# Altium PCB BLE_Module_1R0.PcbDoc
Units mm, origin at the board's own origin, x right, y up, seen from the top; angles counter-clockwise.
Board outline 46.57 x 29.21 mm, 2 copper layers (Top Layer, Bottom Layer); 16 components, 14 nets, 76 pads, 13 vias.
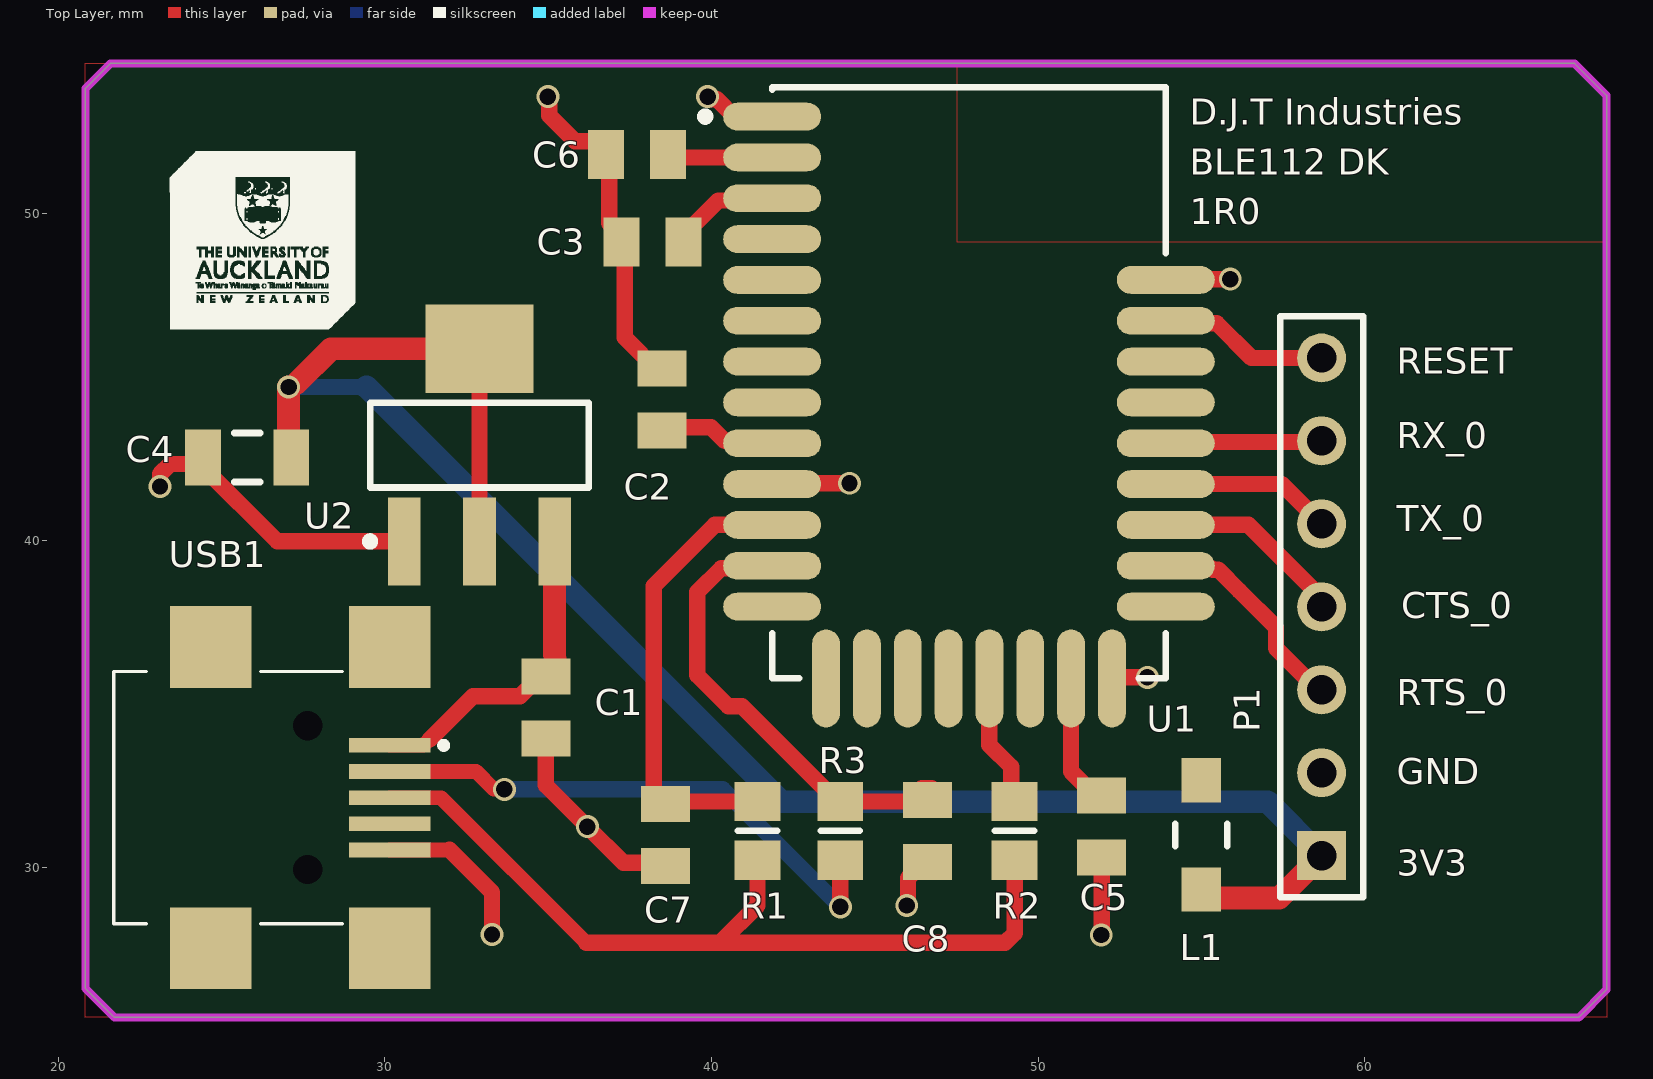
[diagram p0: Top Layer view]
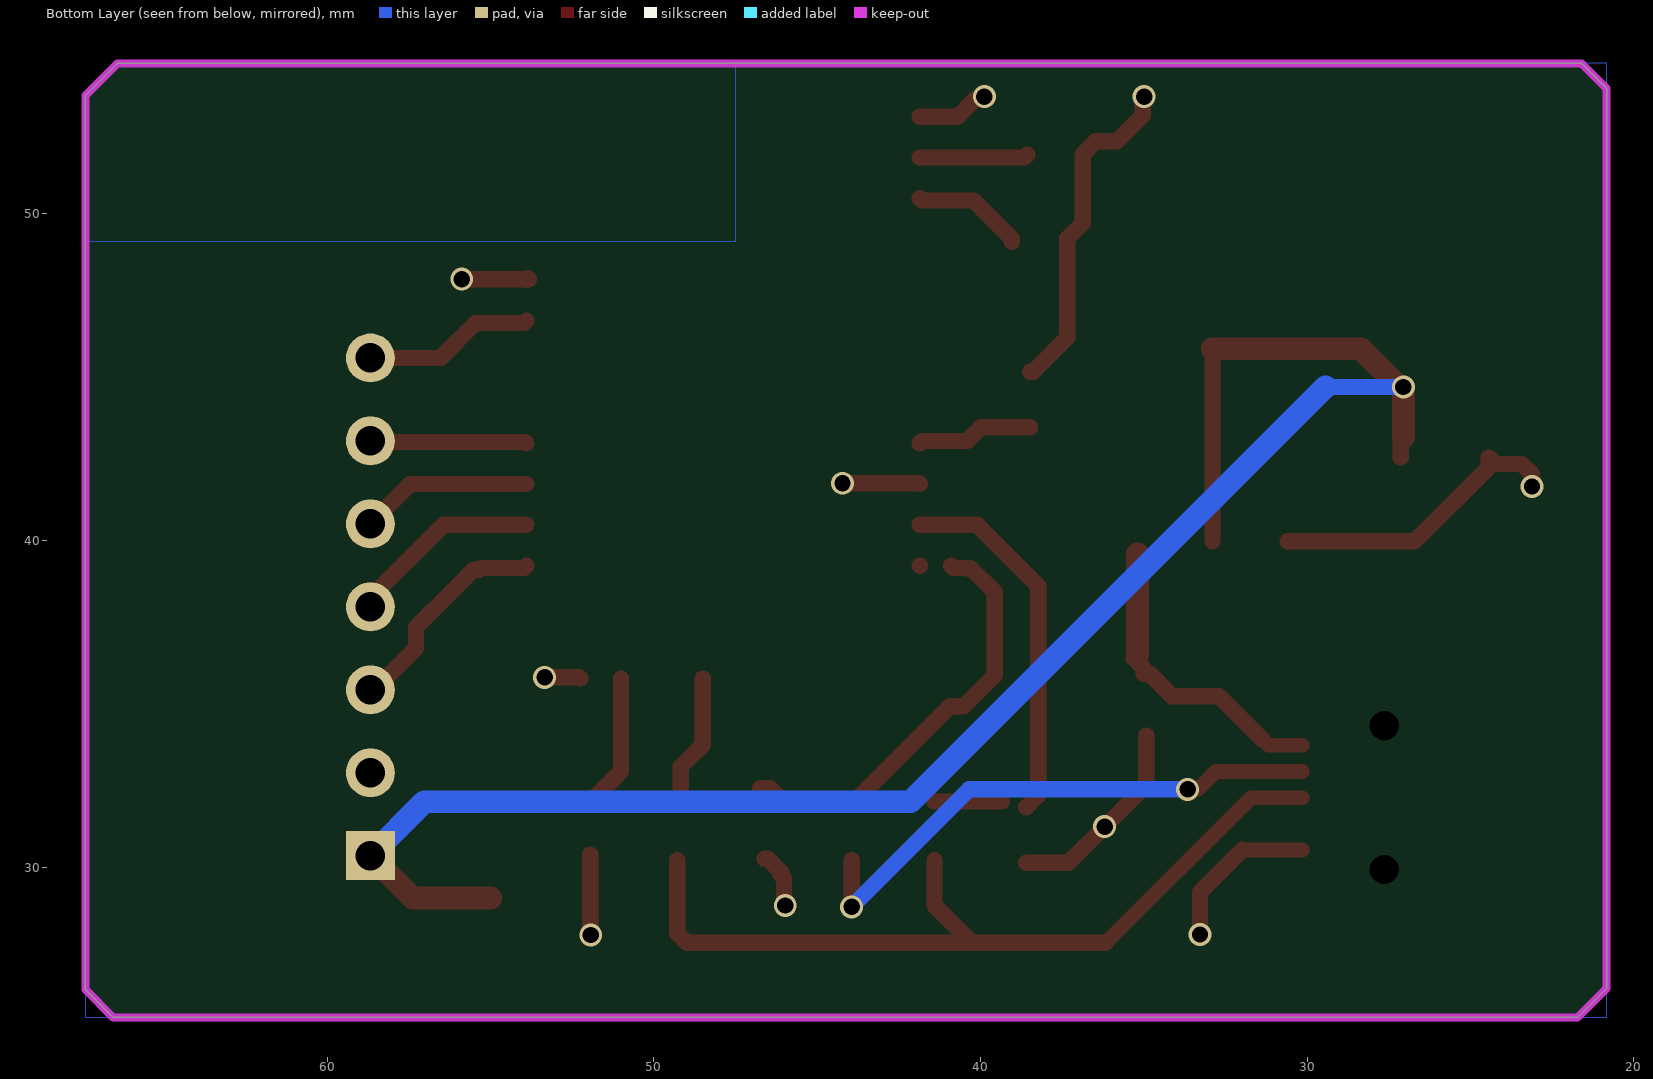
[diagram p1: Bottom Layer view, seen from below]

## Layer stack, top to bottom
Top Solder: solder mask 0.0102, Solder Resist, Dk 3.5
Top Layer: signal copper 0.0356
Dielectric 1: dielectric 0.32, FR-4, Dk 4.8
Bottom Layer: signal copper 0.0356
Bottom Solder: solder mask 0.0102, Solder Resist, Dk 3.5

## Board outline
20.828,26.289 20.828,53.848 21.59,54.61 66.421,54.61 67.4,53.631 67.4,26.252 66.548,25.4 21.717,25.4

## Design rules (kind name [scope] priority, off if disabled: settings)
Clearance clearance_4 [InNamedPolygon('NONET_L01_P000') Or InNamedPolygon('NONET_L02_P001')] p1: gap=0.4 ignorepadtopadclearanceinfootprint=FALSE
Clearance clearance_3 [InNamedPolygon('NONET_L01_P000') Or InNamedPolygon('NONET_L02_P001')] p2: gap=0.254 ignorepadtopadclearanceinfootprint=FALSE except(0: Arc-Hole Track-Hole SMDPad-Hole THPad-Hole Via-Hole Fill-Hole Poly-Hole Region-Hole Text-Hole)
Clearance Clearance_2 [InNamedPolygon('NONET_L01_P000') Or InNamedPolygon('NONET_L02_P001')] p3: gap=0.4 ignorepadtopadclearanceinfootprint=FALSE
Clearance Clearance_1 [All] p4: gap=0.3 ignorepadtopadclearanceinfootprint=TRUE
Clearance [All] p5: gap=0.5 ignorepadtopadclearanceinfootprint=TRUE except(0.3: Track-SMDPad)
PolygonConnect Vias_1 [All vs IsNamedPolygon('NONET_L02_P001')] p1: connectstyle=Direct reliefconductorwidth=0.254 reliefentries=4 polygonreliefangle="90 Angle" airgapwidth=0.254
PolygonConnect PolygonConnect_5 [All vs IsNamedPolygon('NONET_L02_P001')] p2: connectstyle=Relief reliefconductorwidth=0.254 reliefentries=4 polygonreliefangle="90 Angle" airgapwidth=0.254
PolygonConnect Vias [All vs IsNamedPolygon('NONET_L02_P001')] p3: connectstyle=Direct reliefconductorwidth=0.254 reliefentries=4 polygonreliefangle="90 Angle" airgapwidth=0.254
PolygonConnect PolygonConnect_4 [All vs IsNamedPolygon('NONET_L02_P001')] p4: thpad.connectstyle=Direct thpad.reliefconductorwidth=0.254 thpad.reliefentries=4 thpad.polygonreliefangle="90 Angle" thpad.airgapwidth=0.254 smdpad.connectstyle=Relief smdpad.reliefconductorwidth=0.254 smdpad.reliefentries=4 smdpad.polygonreliefangle="90 Angle" smdpad.airgapwidth=0.254 via.connectstyle=Relief via.reliefconductorwidth=0.254 via.reliefentries=4 via.polygonreliefangle="90 Angle" via.airgapwidth=0.254
PolygonConnect PolygonConnect_3 [All vs IsNamedPolygon('NONET_L02_P001')] p5: thpad.connectstyle=Direct thpad.reliefconductorwidth=0.254 thpad.reliefentries=4 thpad.polygonreliefangle="90 Angle" thpad.airgapwidth=0.254 smdpad.connectstyle=Direct smdpad.reliefconductorwidth=0.254 smdpad.reliefentries=4 smdpad.polygonreliefangle="90 Angle" smdpad.airgapwidth=0.254 via.connectstyle=Relief via.reliefconductorwidth=0.254 via.reliefentries=4 via.polygonreliefangle="90 Angle" via.airgapwidth=0.254
PolygonConnect PolygonConnect_2 [All vs IsNamedPolygon('NONET_L01_P000')] p6: thpad.connectstyle=Direct thpad.reliefconductorwidth=0.254 thpad.reliefentries=4 thpad.polygonreliefangle="90 Angle" thpad.airgapwidth=0.254 smdpad.connectstyle=Direct smdpad.reliefconductorwidth=0.254 smdpad.reliefentries=4 smdpad.polygonreliefangle="90 Angle" smdpad.airgapwidth=0.254 via.connectstyle=Relief via.reliefconductorwidth=0.254 via.reliefentries=4 via.polygonreliefangle="90 Angle" via.airgapwidth=0.254
PolygonConnect PolygonConnect_1 [All vs IsNamedPolygon('NONET_L02_P001')] p7: thpad.connectstyle=Direct thpad.reliefconductorwidth=0.254 thpad.reliefentries=4 thpad.polygonreliefangle="90 Angle" thpad.airgapwidth=0.254 smdpad.connectstyle=Direct smdpad.reliefconductorwidth=0.254 smdpad.reliefentries=4 smdpad.polygonreliefangle="90 Angle" smdpad.airgapwidth=0.254 via.connectstyle=Relief via.reliefconductorwidth=0.254 via.reliefentries=4 via.polygonreliefangle="90 Angle" via.airgapwidth=0.254
PolygonConnect [All] p8: connectstyle=Direct reliefconductorwidth=0.254 reliefentries=4 polygonreliefangle="90 Angle" airgapwidth=0.254
RoutingVias [All] p1: holewidth=0.711 width=1.27 viastyle="Through Hole" minholewidth=0.711 minwidth=1.27 maxholewidth=0.711 maxwidth=1.27
SolderMaskExpansion [All] p1: expansion=0.102 istentingtop=FALSE
Width [All] p1: maxlimit=0.7 minlimit=0.45 preferedwidth=0.5 checkconnectedcopper=TRUE
30 further rules are at their usual default settings.

## Components (designator, comment, footprint, x,y, rotation, side; value= is the part's Value field where it differs from the comment)
C1 "1u" C0805 34.925,34.886 r90 top value=?
C2 "1u" C0805 38.481,44.323 r270 top value=?
C3 "1u" C0805 38.188,49.149 r0 top value=?
C4 "4u7" C1206 25.781,42.545 r0 top value=100nF/100V
C5 "1u" C0805 51.943,31.242 r90 top value=?
C6 "1u" C0805 37.719,51.816 r0 top value=?
C7 "4p7" C0805 38.595,30.986 r90 top value=?
C8 "4p7" C0805 46.609,31.115 r90 top value=?
L1 "1k Ferrite Bead" SMD-1206 54.991,30.988 r90 top
P1 "BLE Headers" HDR1X7 58.674,30.353 r90 top
R1 "Resistor 0805" R0805 41.402,31.115 r270 top value=?
R2 "Resistor 0805" R0805 49.276,31.115 r90 top value=?
R3 "Resistor 0805" R0805 43.942,31.115 r270 top value=?
U1 "BLE112-A-V1" BLUE-BLE112-A-V1_V 47.879,44.831 r0 top
U2 "LDL1117S33R" ? 32.893,42.926 r90 top value=3.3V/1.2A
USB1 "USB Mini B Con" USB_UJ2MAB 26.797,32.131 r270 top

## Footprints (in the part's own frame and the unit in brackets; to place one, negate y for a bottom-side part, rotate by r counter-clockwise, add the part's x,y. Pads: shape width x height; smd on the part's side, far side on the other; paste and mask are expansions set on the pad)
BLUE-BLE112-A-V1_V [mm] "BLE112-A, 30-Leads, Body 12.05x18.1mm, Pitch 1.25mm"
  oval 3x0.85 smd: 1(-6.025,8.15) 2(-6.025,6.9) 3(-6.025,5.65) 4(-6.025,4.4) 5(-6.025,3.15) 6(-6.025,1.9) 7(-6.025,0.65) 8(-6.025,-0.6) 9(-6.025,-1.85) 10(-6.025,-3.1) 11(-6.025,-4.35) 12(-6.025,-5.6) 13(-6.025,-6.85) 22(6.025,-6.85) 23(6.025,-5.6) 24(6.025,-4.35) 25(6.025,-3.1) 26(6.025,-1.85) 27(6.025,-0.6) 28(6.025,0.65) 29(6.025,1.9) 30(6.025,3.15)
  oval 0.85x3 smd: 14(-4.375,-9.05) 15(-3.125,-9.05) 16(-1.875,-9.05) 17(-0.625,-9.05) 18(0.625,-9.05) 19(1.875,-9.05) 20(3.125,-9.05) 21(4.375,-9.05)
  silkscreen extent -8.2,-9.05 6.02,9.05, body extent -6.02,-9.05 6.02,9.05, height 2.3
C0805 [mm]
  rect 1.1x1.5 smd: 1(-0.95,0) 2(0.95,0)
  body extent -1.1,-0.72 1.1,0.72, height 1.1
C1206 [mm] "Chip Capacitor, Body 3.2x1.6mm, IPC High Density"
  rect 1.1x1.7 smd: 1(-1.35,0) 2(1.35,0)
  silkscreen extent -0.4,-0.75 0.4,0.75, body extent -1.6,-0.8 1.6,0.8, height 1.5
HDR1X7 [mm] "Connector; Header; 7 Position"
  rect 1.5x1.5 hole 0.9: 1(0,0)
  round 1.5 hole 0.9: 2(2.54,0) 3(5.08,0) 4(7.62,0) 5(10.16,0) 6(12.7,0) 7(15.24,0)
  silkscreen extent -1.27,-1.27 16.51,1.27
R0805 [mm]
  rect 1.2x1.4 smd: 1(-0.9,0) 2(0.9,0)
  silkscreen extent 0,-0.6 0,0.6, body extent -1.07,-0.7 1.07,0.7, height 0.65
SMD-1206 [mm] "Chip Inductor, 2-Leads, Body 3.2x1.6mm"
  rect 1.35x1.2 smd: 1(-1.675,0) 2(1.675,0)
  silkscreen extent -0.35,-0.8 0.35,0.8, body extent -1.6,-0.8 1.6,0.8, height 1.09
USB_UJ2MAB [mm]
  rect 0.45x2.5 smd: 1(-1.6,3.35) 2(-0.8,3.35) 3(0,3.35) 4(0.8,3.35) 5(1.6,3.35)
  rect 2.5x2.5 smd: 6(-4.61,3.35) 7(4.61,3.35) 8(-4.61,-2.13) 9(4.61,-2.13)
  round 0.45 hole 0.9 unplated: 10(-2.2,0.84) 11(2.2,0.84)
  silkscreen extent -3.86,-5.1 3.86,5.1, body extent -4.83,-5.18 4.83,4.2, height 4.13
? [mm] "SOT223/SC73, 4-Leads, Body 6.5x3.5mm, Pitch 2.3mm, Lead Span 7mm, IPC Low Density"
  rect 2.7x1 smd: 1(-2.95,2.3) 2(-2.95,0) 3(-2.95,-2.3)
  rect 2.7x3.3 smd: 2(2.95,0)
  silkscreen extent -3.07,-3.35 1.3,3.47, body extent -3.65,-3.35 3.65,3.35, height 1.83

## Part data
C1 C2 C3 C5 C6 C7 C8: library part CCAP0805, "CCAP0805", MPN=?, Part Description=?, Type="Surface Mount"
C4: library part "Cap CER Decoup C3216C0G2A104J160AC", "CAP CER 0.1UF 100V C0G 1206", Manufacturer="TDK Corporation", MPN=C3216C0G2A104J160AC, Supplier Part Number 1=1795799, Part Description="CAP CER 0.1UF 100V C0G 1206", Supplier 1=RSComponents, Supplier 2=Element14, Supplier 3=Digi-Key, Supplier 4=Mouser, Supplier Part Number 2=2906828, Supplier Part Number 3=445-172677-1-ND, Supplier Part Number 4=810-C3216C0G2A104J6C, Type="Surface mount"
L1: library part 742792113, "SMD EMI Suppression Ferrite Bead WE-CBF, Z = 120 Ohm", ComponentLink1Description="Manufacturer Link", ComponentLink1URL=http://www.we-online.com, ComponentLink2Description=Datasheet, ComponentLink2URL=http://www.we-online.de/katalog/media/pdf/742792113.pdf, DatasheetVersion=Dec-2005, Impedance="120 Ohm", PackageDescription="Chip Inductor, 2-Leads, Body 3.2 x 1.6 mm", PackageReference=SMD-1206, PackageVersion=2007, PartNumber=742792113
P1: library part "Header 7", "Header, 7-Pin", LatestRevisionDate=17-Jul-2002, LatestRevisionNote="Re-released for DXP Platform.", Publisher="Altium Limited"
R1 R2 R3: library part RES0805, "RES0805", MPN=?, Part Description=?, Type="Surface Mount"
U1: "Bluetooth(R) Low Energy Single Mode Module / , 2 to 3.6 V, -40 to 85 degC, 30-Pin SMD, RoHS, Tape and Reel", Max Operating Temperature="85 degC", Max Supply Voltage="3.6 V", Min Operating Temperature="-40 degC", Min Supply Voltage="2.1 V", ComponentLink1Description="Manufacturer URL", ComponentLink1URL=www.bluegiga.com, ComponentLink2Description=Datasheet, ComponentLink2URL=http://www.mouser.com/ds/2/368/Bluegiga_Technologies_BLE112_Datasheet-558666.pdf, DatasheetVersion="Rev. 1.4, 05/2013", PackageDescription="30-Pin Surface Mount Device, Body 12.05 x 18.1 mm, Pitch 1.25 mm", PackageReference=BLE112-A-V1, Packaging="Cut Tape", PartNumber=BLE112-A-V1, Pins=64, REACH SVHC="No SVHC", RoHSCompliant=true
U2: library part "LDO LDL1117S33R", "IC REG LINEAR 3.3V 1.2A SOT223", Manufacturer=STMicroelectronics, Supplier Part Number 1=2729708, MPN=LDL1117S33R, Part Description="IC REG LINEAR 3.3V 1.2A SOT223", Supplier 1=Element14, Supplier 2=Digi-Key, Supplier 3=Mouser, Supplier Part Number 2=497-17239-1-ND, Supplier Part Number 3=511-LDL1117S33R, Type="Surface mount"
USB1: library part USBMiniB, Supplier Part Number 1=102-4004-1-ND, Supplier 1=Digi-Key

## Via types
v1: diameter 0.7, hole 0.5, Top Layer to Bottom Layer, 13 vias

## Nets (pads, with @x,y where several pads share a name; then routed paths per layer and width w, separated by ;. In a path a pad name is that pad's centre, name@x,y a point inside that pad or via, vN(x,y) a via of type N, cw(c..) or ccw(c..) an arc to the next point about the centre after c; other vN are vias at no path point)
3V3: C2.2 C3.2 C5.2 C6.2 L1.2 U1.2 U1.3 U1.9 U1.20 | length 14.5
  Top Layer w0.5: C2.2@38.481,43.473 39.981,43.473 40.406,43.048 41.787,43.048 U1.9 ; C6.2@38.569,51.816 38.654,51.731 U1.2 ; C3.2@39.038,49.149 39.038,49.249 40.203,50.414 41.787,50.414 U1.3 ; U1.20 51.004,32.931 51.843,32.092 C5.2@51.943,32.092
3V3_IN: C4.2 L1.1 P1.1 U2.2 | length 56.2
  Top Layer w0.5: C4.2@27.051,43.171 C4.2@27.089,43.133 ; v1@27.051,44.612 27.051,44.65 27.205,44.804 v1@27.278,44.804 ; C4.2 C4.2@27.131,43.133 ; U2.2@32.893,39.976 U2.2@32.893,45.876
  Top Layer w0.7: C4.2@27.051,43.171 v1(27.051,44.704) ; v1@27.278,44.804 28.35,45.876 U2.2@32.893,45.876 ; L1.1@54.991,29.059 57.38,29.059 P1.1
  Bottom Layer w0.5: v1(27.051,44.704) 29.438,44.704
  Bottom Layer w0.7: 29.438,44.704 42.138,32.004 57.023,32.004 P1.1
5V: C1.2 U2.3 USB1.1 | length 9.6
  Top Layer w0.45: USB1.1 31.172,33.731 31.35,33.909 USB1.1@31.369,33.909
  Top Layer w0.5: USB1.1@31.369,33.909 32.696,35.236 34.132,35.236 34.425,35.529 34.425,35.536 34.806,35.917 35.006,35.917 35.006,36.102 35.306,36.402 35.193,36.515
  Top Layer w0.7: 35.193,36.515 U2.3@35.193,39.595
CTS_0: P1.4 U1.24 | length 6.1
  Top Layer w0.5: U1.24 56.437,40.481 P1.4@58.81,38.109 ; P1.4 P1.4@58.892,37.973
D+: R1.2 R2.1 USB1.3 | length 26.3
  Top Layer w0.45: USB1.3 31.714,32.131 36.159,27.686
  Top Layer w0.5: 36.159,27.686 40.259,27.686 ; R1.2 41.402,28.829 40.259,27.686 ; R2.1 49.276,27.979 48.983,27.686 40.259,27.686
D-: R3.2 USB1.2 | length 16.9
  Top Layer w0.45: USB1.2 32.787,32.931 33.333,32.385 v1(33.655,32.385)
  Top Layer w0.5: v1(43.942,28.786) R3.2
  Bottom Layer w0.5: v1(33.655,32.385) 40.343,32.385 v1(43.942,28.786)
GND: C1.1 C2.1 C3.1 C4.1 C5.1 C6.1 C7.1 C8.1 P1.2 U1.1 U1.10 U1.21 U1.30 U2.1 USB1.5 | length 43
  Top Layer w0.45: USB1.5 31.976,30.531
  Top Layer w0.5: v1(23.114,41.656) 23.114,42.037 23.424,42.347 24.233,42.347 C4.1 24.431,42.245 26.7,39.976 U2.1 ; 31.976,30.531 33.274,29.233 v1(33.274,27.94) ; C1.1@34.925,34.036 34.925,32.512 v1(36.195,31.242) 37.301,30.136 C7.1@38.595,30.136 ; v1(34.987,53.594) 35.025,53.556 35.025,53.015 35.816,52.224 36.469,52.224 36.869,51.824 36.869,49.718 37.338,49.249 37.338,49.149 37.338,46.216 38.381,45.173 C2.1@38.481,45.173 ; v1(39.878,53.594) 39.963,53.509 40.167,53.509 40.694,52.981 U1.1 ; U1.10 41.88,41.757 v1(44.222,41.757) ; v1(45.974,28.829) 46.012,28.867 46.012,29.668 46.109,29.765 46.109,29.865 46.509,30.265 C8.1@46.609,30.265 ; v1(51.927,27.924) 51.943,27.94 C5.1@51.943,30.392 ; U1.21 52.287,35.814 v1(53.34,35.814) ; U1.30 U1.30@53.879,48.006 ; v1(55.88,48.006) U1.30@53.879,48.006 ; P1.2@58.571,32.79 P1.2 ; U1.30@53.879,48.006 53.817,48.006 53.848,48.037 U1.30@53.879,48.006
P1_0: R2.2 U1.18 | length 4.1
  Top Layer w0.5: U1.18 48.504,33.745 49.177,33.072 49.177,32.114 R2.2
RESET: P1.7 U1.29 | length 5.5
  Top Layer w0.5: U1.29 53.971,46.664 55.293,46.664 55.301,46.656 55.466,46.656 56.529,45.593 P1.7 P1.7@58.865,45.784
RTS_0: P1.3 U1.23 | length 6.7
  Top Layer w0.5: U1.23 53.971,39.164 55.293,39.164 55.351,39.106 55.516,39.106 56.154,38.468 57.277,37.345 57.277,36.703 58.547,35.433 P1.3
RX_0: P1.6 U1.26 | length 5.1
  Top Layer w0.5: U1.26 53.94,43.017 58.674,43.017 P1.6@58.692,43.035 ; P1.6 P1.6@58.945,43.053
TX_0: P1.5 U1.25 | length 5.5
  Top Layer w0.5: U1.25 57.456,41.731 P1.5 ; P1.5@58.737,40.576 P1.5 ; P1.5@58.763,40.513 P1.5
USB+: C7.2 R1.1 U1.11 | length 13.4
  Top Layer w0.5: C7.2@38.595,31.836 38.227,32.203 38.227,38.608 40.1,40.481 U1.11 ; C7.2@39.343,32.015 R1.1
USB-: C8.2 R3.1 U1.12 | length 13.2
  Top Layer w0.5: U1.12@40.889,39.231 40.822,39.164 40.465,39.164 40.457,39.156 40.292,39.156 39.563,38.426 39.563,35.875 40.513,34.925 40.932,34.925 43.842,32.015 46.033,32.015 46.436,32.418 C8.2@46.736,32.418 ; U1.12 U1.12@41.86,39.237
pads on no net: U1.4 U1.5 U1.6 U1.7 U1.8 U1.13 U1.14 U1.15 U1.16 U1.17 U1.19 U1.22 U1.27 U1.28 USB1.4 USB1.6 USB1.7 USB1.8 USB1.9 USB1.10 USB1.11

## Polygon pours and split planes (outlines as drawn)
3V3 on Top Layer "NONET_L01_P000" (solid, remove dead copper, shelved, pour order 0): 20.828,54.61 47.498,54.61 47.498,49.149 67.4,49.149 67.4,25.4 20.828,25.4
GND on Bottom Layer "NONET_L02_P001" (solid, remove dead copper, shelved, pour order 1): 20.828,54.61 47.498,54.61 47.498,49.149 67.4,49.149 67.4,25.4 20.828,25.4

## Keep-outs
Keep-Out Layer:
  the board outline again, w0.254

## Silkscreen, mask and mechanical layers (free items; w line width, h text height)
Top Overlay:
  drawing of 24 lines, arcs and shapes, not listed
  text "D.J.T Industries" at 54.633,52.728 h0.8
  text "BLE112 DK" at 54.633,51.204 h0.8
  text "1R0" at 54.633,49.68 h0.8
  text "RESET" at 60.983,45.108 h0.8
  text "RX_0" at 60.983,42.828 h0.8
  text "TX_0" at 60.983,40.288 h0.8
  text "CTS_0" at 61.11,37.621 h0.8
  text "RTS_0" at 60.983,34.954 h0.8
  text "GND" at 60.983,32.535 h0.8
  text "3V3" at 60.983,29.741 h0.8